# EAGLE board PoppingElement-array (EAGLE 6.5.0)
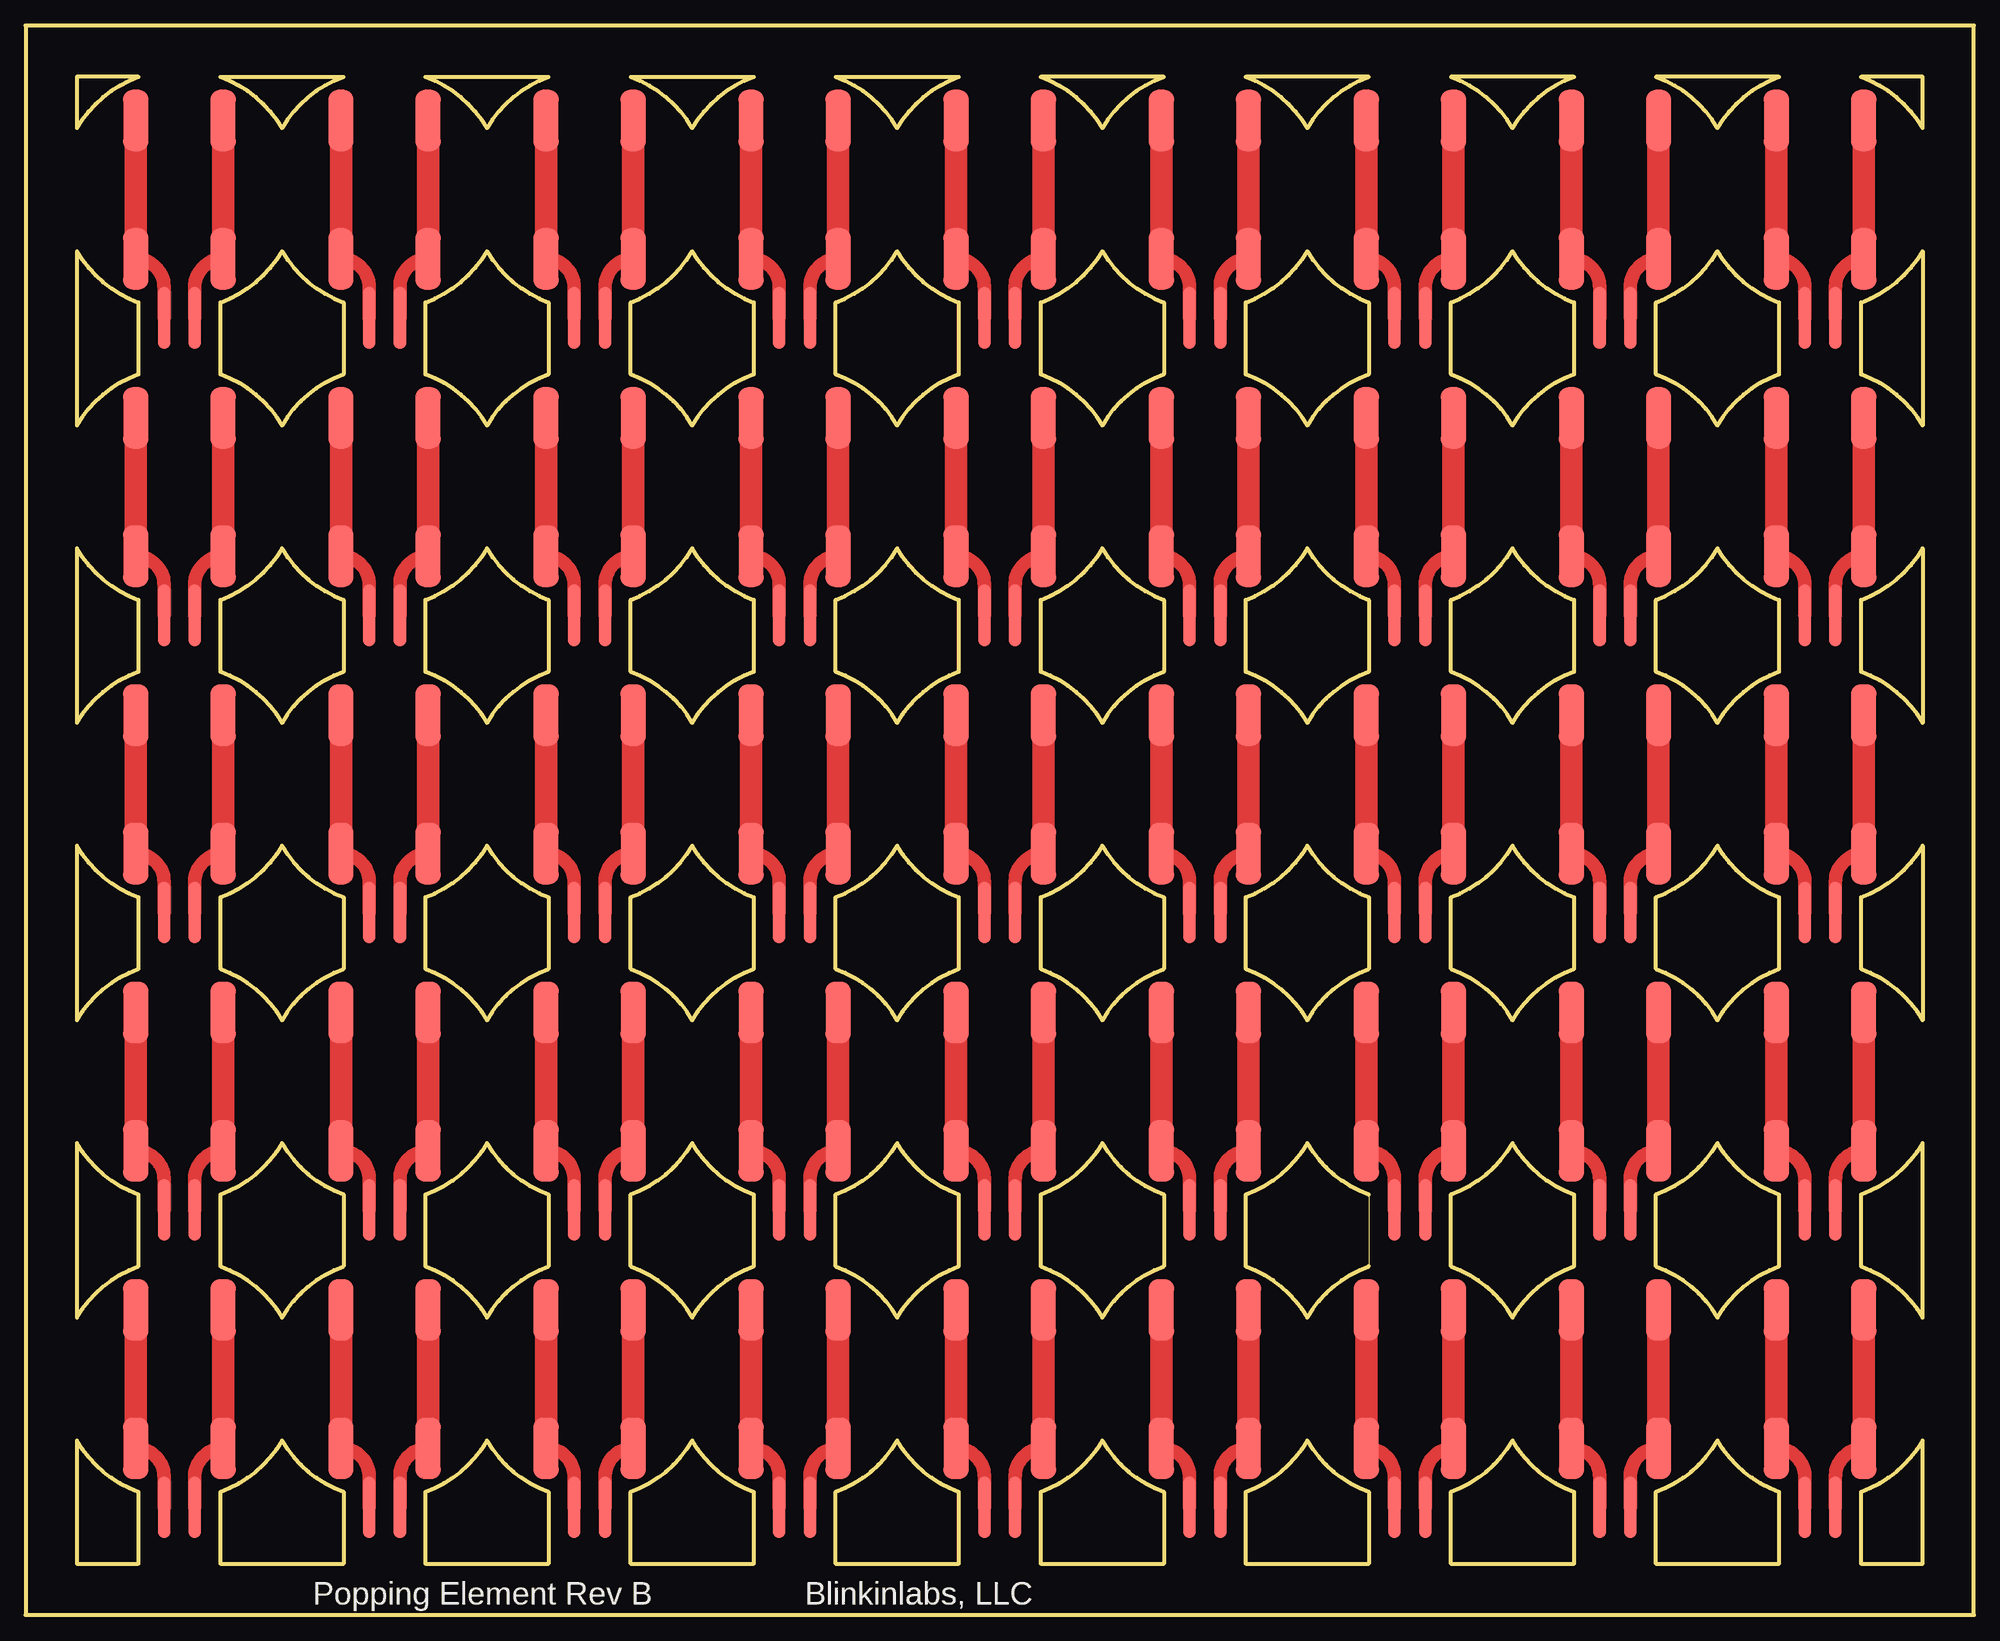
[diagram p0: board, top side]
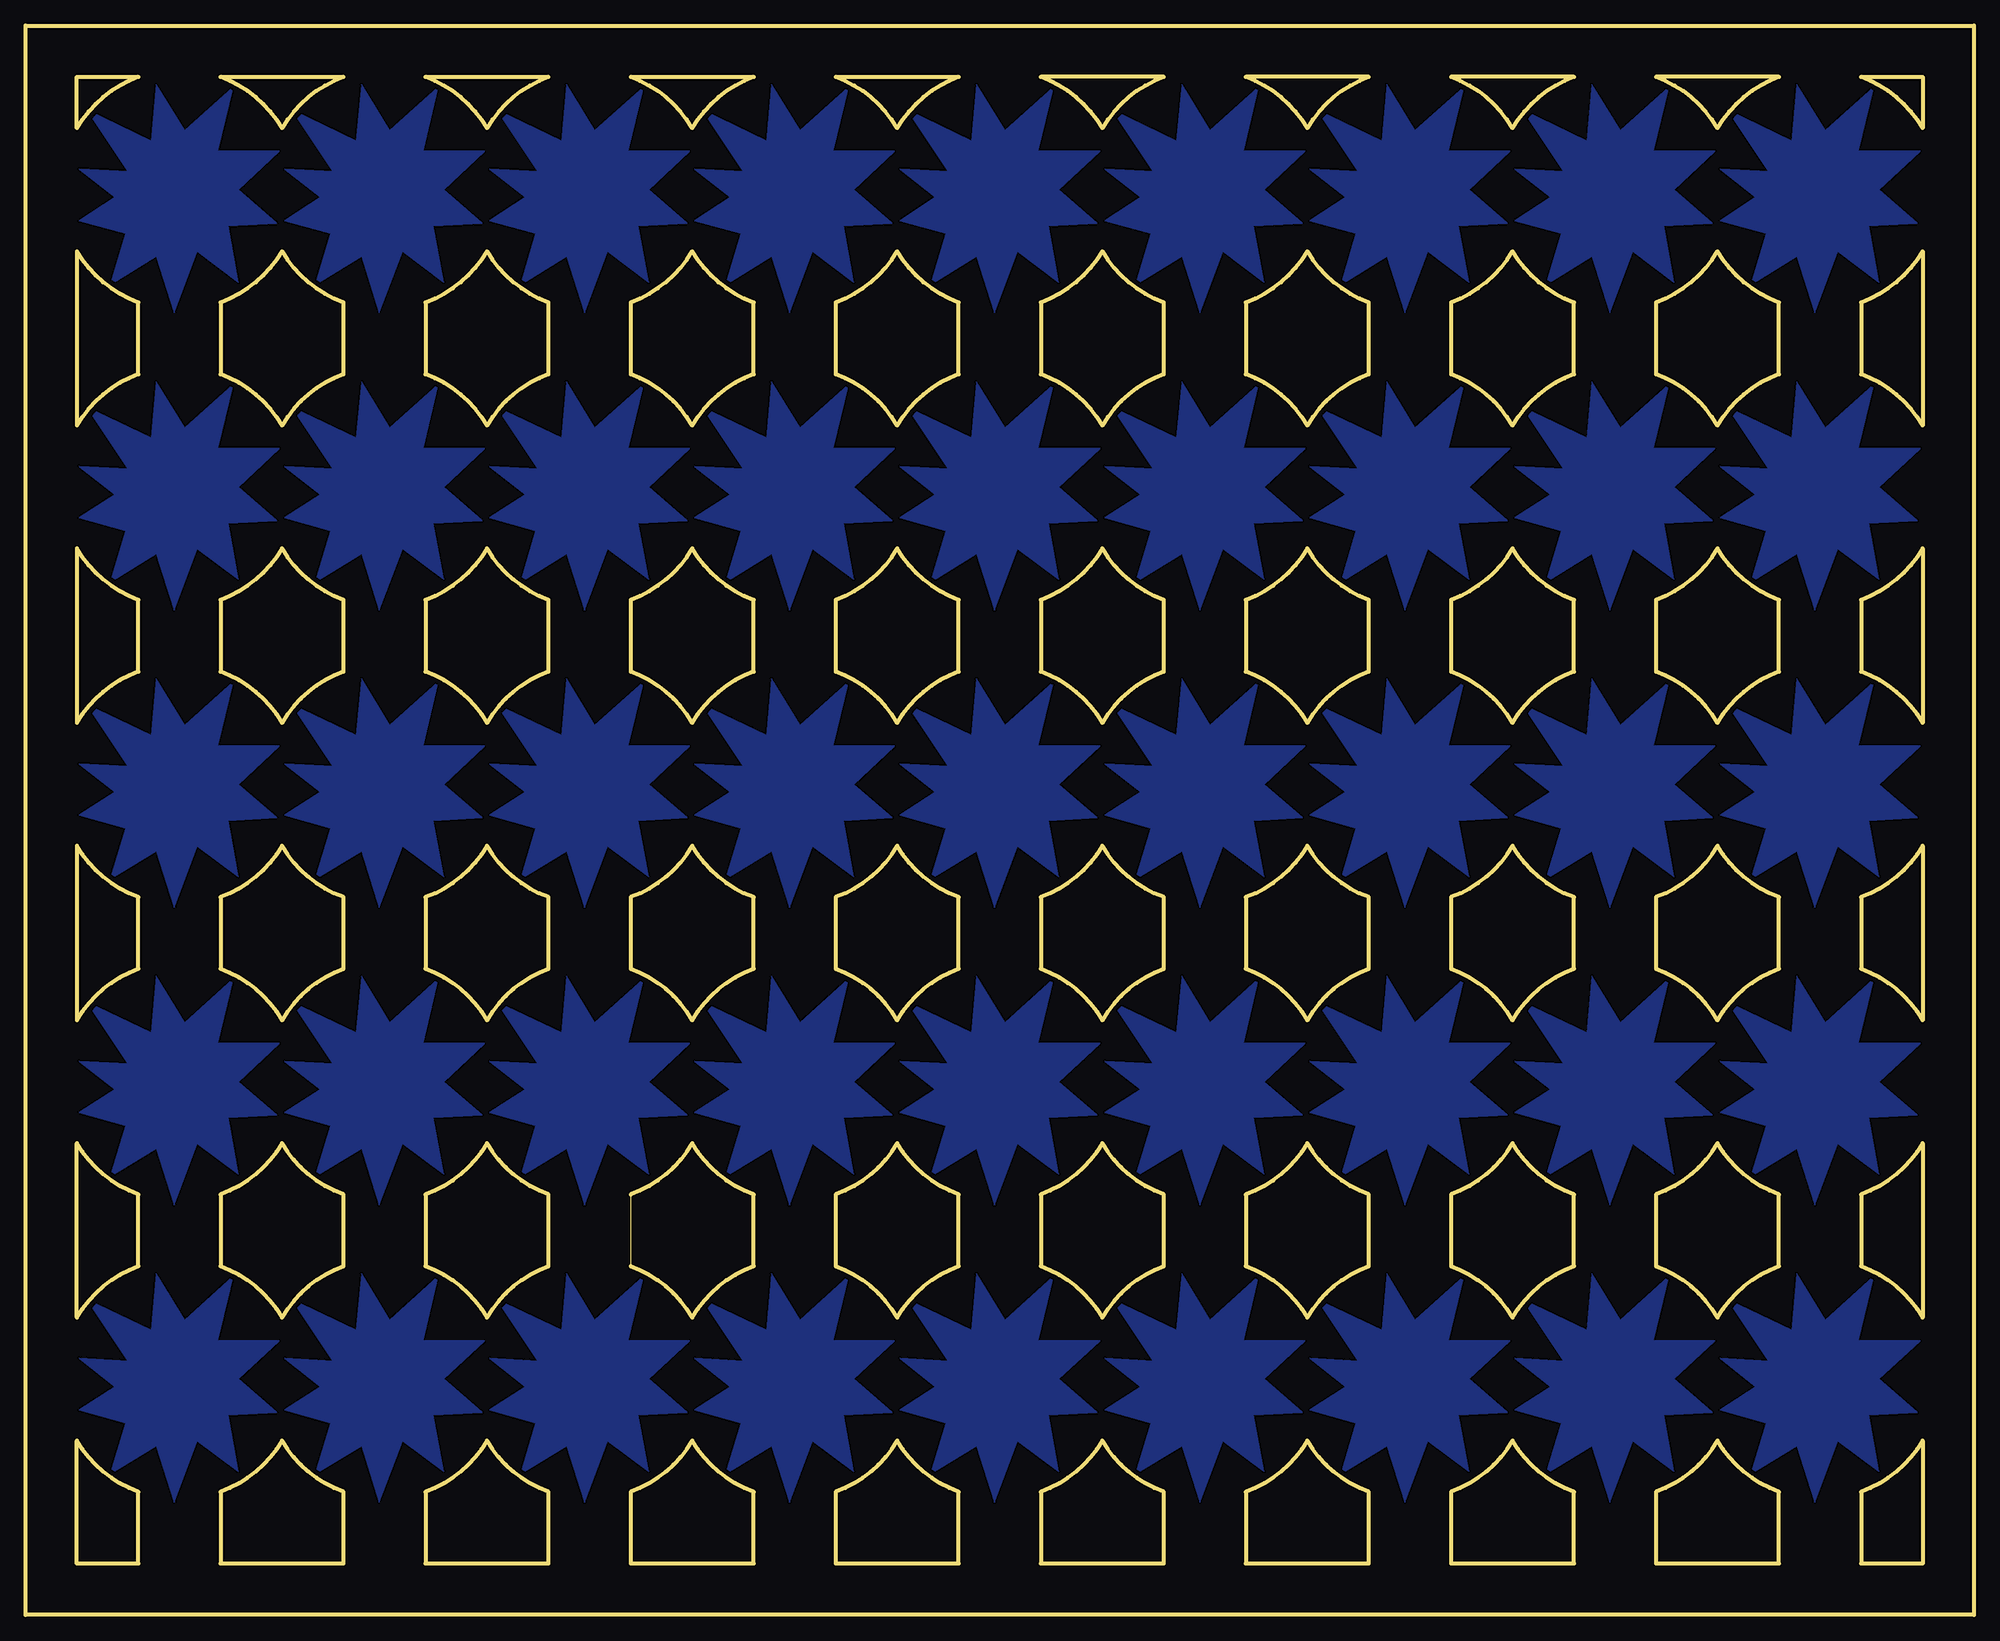
[diagram p1: board, bottom side, seen from below]

Size 190 x 155 mm. Coordinates in mm from the lower left corner, seen from the top.
Outline: 0,0 190,0 190,155 0,155 0,0
Outline: 19,121 19,128 arc40 25,133 arc40 31,128 31,121 arc40 25,116 arc40 19,121
Outline: 11,128 11,121 arc40 5,116 5,133 arc40 11,128
Outline: 19,150 arc-40 25,145 arc-40 31,150 19,150
Outline: 5,145 arc-40 11,150 5,150 5,145
Outline: 39,121 39,128 arc40 45,133 arc40 51,128 51,121 arc40 45,116 arc40 39,121
Outline: 39,150 arc-40 45,145 arc-40 51,150 39,150
Outline: 59,121 59,128 arc40 65,133 arc40 71,128 71,121 arc40 65,116 arc40 59,121
Outline: 59,150 arc-40 65,145 arc-40 71,150 59,150
Outline: 79,121 79,128 arc40 85,133 arc40 91,128 91,121 arc40 85,116 arc40 79,121
Outline: 79,150 arc-40 85,145 arc-40 91,150 79,150
Outline: 99,121 99,128 arc40 105,133 arc40 111,128 111,121 arc40 105,116 arc40 99,121
Outline: 99,150 arc-40 105,145 arc-40 111,150 99,150
Outline: 119,121 119,128 arc40 125,133 arc40 131,128 131,121 arc40 125,116 arc40 119,121
Outline: 119,150 arc-40 125,145 arc-40 131,150 119,150
Outline: 139,121 139,128 arc40 145,133 arc40 151,128 151,121 arc40 145,116 arc40 139,121
Outline: 139,150 arc-40 145,145 arc-40 151,150 139,150
Outline: 159,121 159,128 arc40 165,133 arc40 171,128 171,121 arc40 165,116 arc40 159,121
Outline: 159,150 arc-40 165,145 arc-40 171,150 159,150
Outline: 179,121 179,128 arc40 185,133 185,116 arc40 179,121
Outline: 179,150 arc-40 185,145 185,150 179,150
Outline: 19,92 19,99 arc40 25,104 arc40 31,99 31,92 arc40 25,87 arc40 19,92
Outline: 11,99 11,92 arc40 5,87 5,104 arc40 11,99
Outline: 39,92 39,99 arc40 45,104 arc40 51,99 51,92 arc40 45,87 arc40 39,92
Outline: 59,92 59,99 arc40 65,104 arc40 71,99 71,92 arc40 65,87 arc40 59,92
Outline: 79,92 79,99 arc40 85,104 arc40 91,99 91,92 arc40 85,87 arc40 79,92
Outline: 99,92 99,99 arc40 105,104 arc40 111,99 111,92 arc40 105,87 arc40 99,92
Outline: 119,92 119,99 arc40 125,104 arc40 131,99 131,92 arc40 125,87 arc40 119,92
Outline: 139,92 139,99 arc40 145,104 arc40 151,99 151,92 arc40 145,87 arc40 139,92
Outline: 159,92 159,99 arc40 165,104 arc40 171,99 171,92 arc40 165,87 arc40 159,92
Outline: 179,92 179,99 arc40 185,104 185,87 arc40 179,92
Outline: 19,63 19,70 arc40 25,75 arc40 31,70 31,63 arc40 25,58 arc40 19,63
Outline: 11,70 11,63 arc40 5,58 5,75 arc40 11,70
Outline: 39,63 39,70 arc40 45,75 arc40 51,70 51,63 arc40 45,58 arc40 39,63
Outline: 59,63 59,70 arc40 65,75 arc40 71,70 71,63 arc40 65,58 arc40 59,63
Outline: 79,63 79,70 arc40 85,75 arc40 91,70 91,63 arc40 85,58 arc40 79,63
Outline: 99,63 99,70 arc40 105,75 arc40 111,70 111,63 arc40 105,58 arc40 99,63
Outline: 119,63 119,70 arc40 125,75 arc40 131,70 131,63 arc40 125,58 arc40 119,63
Outline: 139,63 139,70 arc40 145,75 arc40 151,70 151,63 arc40 145,58 arc40 139,63
Outline: 159,63 159,70 arc40 165,75 arc40 171,70 171,63 arc40 165,58 arc40 159,63
Outline: 179,63 179,70 arc40 185,75 185,58 arc40 179,63
Outline: 19,34 19,41 arc40 25,46 arc40 31,41 31,34 arc40 25,29 arc40 19,34
Outline: 11,41 11,34 arc40 5,29 5,46 arc40 11,41
Outline: 39,34 39,41 arc40 45,46 arc40 51,41 51,34 arc40 45,29 arc40 39,34
Outline: 59,34 59,41 arc40 65,46 arc40 71,41 71,34 arc40 65,29 arc40 59,34
Outline: 79,34 79,41 arc40 85,46 arc40 91,41 91,34 arc40 85,29 arc40 79,34
Outline: 99,34 99,41 arc40 105,46 arc40 111,41 111,34 arc40 105,29 arc40 99,34
Outline: 119,34 119,41 arc40 125,46 arc40 131,41 131,34 arc40 125,29 arc40 119,34
Outline: 139,34 139,41 arc40 145,46 arc40 151,41 151,34 arc40 145,29 arc40 139,34
Outline: 159,34 159,41 arc40 165,46 arc40 171,41 171,34 arc40 165,29 arc40 159,34
Outline: 179,34 179,41 arc40 185,46 185,29 arc40 179,34
Outline: 19,5 19,12 arc40 25,17 arc40 31,12 31,5 19,5
Outline: 11,12 11,5 5,5 5,17 arc40 11,12
Outline: 39,5 39,12 arc40 45,17 arc40 51,12 51,5 39,5
Outline: 59,5 59,12 arc40 65,17 arc40 71,12 71,5 59,5
Outline: 79,5 79,12 arc40 85,17 arc40 91,12 91,5 79,5
Outline: 99,5 99,12 arc40 105,17 arc40 111,12 111,5 99,5
Outline: 119,5 119,12 arc40 125,17 arc40 131,12 131,5 119,5
Outline: 139,5 139,12 arc40 145,17 arc40 151,12 151,5 139,5
Outline: 159,5 159,12 arc40 165,17 arc40 171,12 171,5 159,5
Outline: 179,5 179,12 arc40 185,17 185,5 179,5
Copper layers (1*16): Top 0.035mm / dielectric 1.5mm / Bottom 0.035mm
Design rules "default *": minimum track width 10mil, minimum drill 24mil, track to track 8mil, track to pad 8mil, pad to pad 8mil, via to via 8mil, smd to smd 8mil, copper to edge 0.5mm, drill to drill 8mil, minimum pad ring 10mil, minimum via ring 8mil, stop-mask expansion 4mil, vias tented up to drill 0mil, thermal gap 10mil

## Footprints (pad centres in the part's own frame; a part is rotated, then mirrored left to right if it is on the bottom)
CIGARETTE_LIGHTER = smd 2.5 x 6: P$1 -4.25,6.75; P$2 4.25,6.75; P$3 -4.25,-6.75; P$4 4.25,-6.75
PADS_2MMX2 = smd 1.2 x 6: P$1 1.5,0; P$2 -1.5,0

## Placement (x,y rotation side)
U$1  CIGARETTE_LIGHTER  [CIGARETTE_LIGHTER]  15,110 0 top
U$2  M02  [PADS_2MMX2]  15,97.5 0 top
U$5  CIGARETTE_LIGHTER  [CIGARETTE_LIGHTER]  35,110 0 top
U$6  M02  [PADS_2MMX2]  35,97.5 0 top
U$7  CIGARETTE_LIGHTER  [CIGARETTE_LIGHTER]  55,110 0 top
U$8  M02  [PADS_2MMX2]  55,97.5 0 top
U$9  CIGARETTE_LIGHTER  [CIGARETTE_LIGHTER]  15,139 0 top
U$10  M02  [PADS_2MMX2]  15,126.5 0 top
U$11  CIGARETTE_LIGHTER  [CIGARETTE_LIGHTER]  35,139 0 top
U$12  M02  [PADS_2MMX2]  35,126.5 0 top
U$13  CIGARETTE_LIGHTER  [CIGARETTE_LIGHTER]  55,139 0 top
U$14  M02  [PADS_2MMX2]  55,126.5 0 top
U$15  CIGARETTE_LIGHTER  [CIGARETTE_LIGHTER]  75,139 0 top
U$16  M02  [PADS_2MMX2]  75,126.5 0 top
U$17  CIGARETTE_LIGHTER  [CIGARETTE_LIGHTER]  15,23 0 top
U$18  M02  [PADS_2MMX2]  15,10.5 0 top
U$19  CIGARETTE_LIGHTER  [CIGARETTE_LIGHTER]  35,23 0 top
U$20  M02  [PADS_2MMX2]  35,10.5 0 top
U$21  CIGARETTE_LIGHTER  [CIGARETTE_LIGHTER]  95,139 0 top
U$22  M02  [PADS_2MMX2]  95,126.5 0 top
U$23  CIGARETTE_LIGHTER  [CIGARETTE_LIGHTER]  115,139 0 top
U$24  M02  [PADS_2MMX2]  115,126.5 0 top
U$25  CIGARETTE_LIGHTER  [CIGARETTE_LIGHTER]  135,139 0 top
U$26  M02  [PADS_2MMX2]  135,126.5 0 top
U$27  CIGARETTE_LIGHTER  [CIGARETTE_LIGHTER]  155,139 0 top
U$28  M02  [PADS_2MMX2]  155,126.5 0 top
U$29  CIGARETTE_LIGHTER  [CIGARETTE_LIGHTER]  175,139 0 top
U$30  M02  [PADS_2MMX2]  175,126.5 0 top
U$31  CIGARETTE_LIGHTER  [CIGARETTE_LIGHTER]  75,110 0 top
U$32  M02  [PADS_2MMX2]  75,97.5 0 top
U$33  CIGARETTE_LIGHTER  [CIGARETTE_LIGHTER]  95,110 0 top
U$34  M02  [PADS_2MMX2]  95,97.5 0 top
U$35  CIGARETTE_LIGHTER  [CIGARETTE_LIGHTER]  115,110 0 top
U$36  M02  [PADS_2MMX2]  115,97.5 0 top
U$37  CIGARETTE_LIGHTER  [CIGARETTE_LIGHTER]  135,110 0 top
U$38  M02  [PADS_2MMX2]  135,97.5 0 top
U$39  CIGARETTE_LIGHTER  [CIGARETTE_LIGHTER]  155,110 0 top
U$40  M02  [PADS_2MMX2]  155,97.5 0 top
U$41  CIGARETTE_LIGHTER  [CIGARETTE_LIGHTER]  175,110 0 top
U$42  M02  [PADS_2MMX2]  175,97.5 0 top
U$43  CIGARETTE_LIGHTER  [CIGARETTE_LIGHTER]  15,81 0 top
U$44  M02  [PADS_2MMX2]  15,68.5 0 top
U$45  CIGARETTE_LIGHTER  [CIGARETTE_LIGHTER]  35,81 0 top
U$46  M02  [PADS_2MMX2]  35,68.5 0 top
U$47  CIGARETTE_LIGHTER  [CIGARETTE_LIGHTER]  55,81 0 top
U$48  M02  [PADS_2MMX2]  55,68.5 0 top
U$49  CIGARETTE_LIGHTER  [CIGARETTE_LIGHTER]  75,81 0 top
U$50  M02  [PADS_2MMX2]  75,68.5 0 top
U$51  CIGARETTE_LIGHTER  [CIGARETTE_LIGHTER]  95,81 0 top
U$52  M02  [PADS_2MMX2]  95,68.5 0 top
U$53  CIGARETTE_LIGHTER  [CIGARETTE_LIGHTER]  115,81 0 top
U$54  M02  [PADS_2MMX2]  115,68.5 0 top
U$55  CIGARETTE_LIGHTER  [CIGARETTE_LIGHTER]  135,81 0 top
U$56  M02  [PADS_2MMX2]  135,68.5 0 top
U$57  CIGARETTE_LIGHTER  [CIGARETTE_LIGHTER]  155,81 0 top
U$58  M02  [PADS_2MMX2]  155,68.5 0 top
U$59  CIGARETTE_LIGHTER  [CIGARETTE_LIGHTER]  175,81 0 top
U$60  M02  [PADS_2MMX2]  175,68.5 0 top
U$61  CIGARETTE_LIGHTER  [CIGARETTE_LIGHTER]  15,52 0 top
U$62  M02  [PADS_2MMX2]  15,39.5 0 top
U$63  CIGARETTE_LIGHTER  [CIGARETTE_LIGHTER]  35,52 0 top
U$64  M02  [PADS_2MMX2]  35,39.5 0 top
U$65  CIGARETTE_LIGHTER  [CIGARETTE_LIGHTER]  55,52 0 top
U$66  M02  [PADS_2MMX2]  55,39.5 0 top
U$67  CIGARETTE_LIGHTER  [CIGARETTE_LIGHTER]  75,52 0 top
U$68  M02  [PADS_2MMX2]  75,39.5 0 top
U$69  CIGARETTE_LIGHTER  [CIGARETTE_LIGHTER]  95,52 0 top
U$70  M02  [PADS_2MMX2]  95,39.5 0 top
U$71  CIGARETTE_LIGHTER  [CIGARETTE_LIGHTER]  115,52 0 top
U$72  M02  [PADS_2MMX2]  115,39.5 0 top
U$73  CIGARETTE_LIGHTER  [CIGARETTE_LIGHTER]  135,52 0 top
U$74  M02  [PADS_2MMX2]  135,39.5 0 top
U$75  CIGARETTE_LIGHTER  [CIGARETTE_LIGHTER]  155,52 0 top
U$76  M02  [PADS_2MMX2]  155,39.5 0 top
U$77  CIGARETTE_LIGHTER  [CIGARETTE_LIGHTER]  175,52 0 top
U$78  M02  [PADS_2MMX2]  175,39.5 0 top
U$79  CIGARETTE_LIGHTER  [CIGARETTE_LIGHTER]  55,23 0 top
U$80  M02  [PADS_2MMX2]  55,10.5 0 top
U$81  CIGARETTE_LIGHTER  [CIGARETTE_LIGHTER]  75,23 0 top
U$82  M02  [PADS_2MMX2]  75,10.5 0 top
U$83  CIGARETTE_LIGHTER  [CIGARETTE_LIGHTER]  95,23 0 top
U$84  M02  [PADS_2MMX2]  95,10.5 0 top
U$85  CIGARETTE_LIGHTER  [CIGARETTE_LIGHTER]  115,23 0 top
U$86  M02  [PADS_2MMX2]  115,10.5 0 top
U$87  CIGARETTE_LIGHTER  [CIGARETTE_LIGHTER]  135,23 0 top
U$88  M02  [PADS_2MMX2]  135,10.5 0 top
U$89  CIGARETTE_LIGHTER  [CIGARETTE_LIGHTER]  155,23 0 top
U$90  M02  [PADS_2MMX2]  155,10.5 0 top
U$91  CIGARETTE_LIGHTER  [CIGARETTE_LIGHTER]  175,23 0 top
U$92  M02  [PADS_2MMX2]  175,10.5 0 top

## Library data of the parts
U$1 U$2 U$5-U$92 = blinkinlabs

## Nets
N$1: U$1.P$1 U$1.P$3 U$2.P$2
N$2: U$1.P$2 U$1.P$4 U$2.P$1
N$7: U$5.P$1 U$5.P$3 U$6.P$2
N$8: U$5.P$2 U$5.P$4 U$6.P$1
N$10: U$7.P$1 U$7.P$3 U$8.P$2
N$11: U$7.P$2 U$7.P$4 U$8.P$1
N$13: U$9.P$1 U$9.P$3 U$10.P$2
N$14: U$9.P$2 U$9.P$4 U$10.P$1
N$16: U$11.P$1 U$11.P$3 U$12.P$2
N$17: U$11.P$2 U$11.P$4 U$12.P$1
N$19: U$13.P$1 U$13.P$3 U$14.P$2
N$20: U$13.P$2 U$13.P$4 U$14.P$1
N$22: U$15.P$1 U$15.P$3 U$16.P$2
N$23: U$15.P$2 U$15.P$4 U$16.P$1
N$25: U$21.P$1 U$21.P$3 U$22.P$2
N$26: U$17.P$1 U$17.P$3 U$18.P$2
N$27: U$17.P$2 U$17.P$4 U$18.P$1
N$29: U$19.P$1 U$19.P$3 U$20.P$2
N$30: U$19.P$2 U$19.P$4 U$20.P$1
N$32: U$21.P$2 U$21.P$4 U$22.P$1
N$33: U$31.P$1 U$31.P$3 U$32.P$2
N$35: U$23.P$1 U$23.P$3 U$24.P$2
N$36: U$23.P$2 U$23.P$4 U$24.P$1
N$38: U$25.P$1 U$25.P$3 U$26.P$2
N$39: U$25.P$2 U$25.P$4 U$26.P$1
N$41: U$27.P$1 U$27.P$3 U$28.P$2
N$42: U$27.P$2 U$27.P$4 U$28.P$1
N$44: U$29.P$1 U$29.P$3 U$30.P$2
N$45: U$29.P$2 U$29.P$4 U$30.P$1
N$47: U$31.P$2 U$31.P$4 U$32.P$1
N$49: U$33.P$1 U$33.P$3 U$34.P$2
N$50: U$33.P$2 U$33.P$4 U$34.P$1
N$52: U$35.P$1 U$35.P$3 U$36.P$2
N$53: U$35.P$2 U$35.P$4 U$36.P$1
N$55: U$37.P$1 U$37.P$3 U$38.P$2
N$56: U$37.P$2 U$37.P$4 U$38.P$1
N$58: U$39.P$1 U$39.P$3 U$40.P$2
N$59: U$39.P$2 U$39.P$4 U$40.P$1
N$61: U$41.P$1 U$41.P$3 U$42.P$2
N$62: U$41.P$2 U$41.P$4 U$42.P$1
N$64: U$43.P$1 U$43.P$3 U$44.P$2
N$65: U$43.P$2 U$43.P$4 U$44.P$1
N$67: U$45.P$1 U$45.P$3 U$46.P$2
N$68: U$45.P$2 U$45.P$4 U$46.P$1
N$70: U$47.P$1 U$47.P$3 U$48.P$2
N$71: U$47.P$2 U$47.P$4 U$48.P$1
N$73: U$49.P$1 U$49.P$3 U$50.P$2
N$74: U$49.P$2 U$49.P$4 U$50.P$1
N$76: U$51.P$1 U$51.P$3 U$52.P$2
N$77: U$51.P$2 U$51.P$4 U$52.P$1
N$79: U$53.P$1 U$53.P$3 U$54.P$2
N$80: U$53.P$2 U$53.P$4 U$54.P$1
N$82: U$55.P$1 U$55.P$3 U$56.P$2
N$83: U$55.P$2 U$55.P$4 U$56.P$1
N$85: U$57.P$1 U$57.P$3 U$58.P$2
N$86: U$57.P$2 U$57.P$4 U$58.P$1
N$88: U$59.P$1 U$59.P$3 U$60.P$2
N$89: U$59.P$2 U$59.P$4 U$60.P$1
N$91: U$61.P$1 U$61.P$3 U$62.P$2
N$92: U$61.P$2 U$61.P$4 U$62.P$1
N$94: U$63.P$1 U$63.P$3 U$64.P$2
N$95: U$63.P$2 U$63.P$4 U$64.P$1
N$97: U$65.P$1 U$65.P$3 U$66.P$2
N$98: U$65.P$2 U$65.P$4 U$66.P$1
N$100: U$67.P$1 U$67.P$3 U$68.P$2
N$101: U$67.P$2 U$67.P$4 U$68.P$1
N$103: U$69.P$1 U$69.P$3 U$70.P$2
N$104: U$69.P$2 U$69.P$4 U$70.P$1
N$106: U$71.P$1 U$71.P$3 U$72.P$2
N$107: U$71.P$2 U$71.P$4 U$72.P$1
N$109: U$73.P$1 U$73.P$3 U$74.P$2
N$110: U$73.P$2 U$73.P$4 U$74.P$1
N$112: U$75.P$1 U$75.P$3 U$76.P$2
N$113: U$75.P$2 U$75.P$4 U$76.P$1
N$115: U$77.P$1 U$77.P$3 U$78.P$2
N$116: U$77.P$2 U$77.P$4 U$78.P$1
N$118: U$79.P$1 U$79.P$3 U$80.P$2
N$119: U$79.P$2 U$79.P$4 U$80.P$1
N$121: U$81.P$1 U$81.P$3 U$82.P$2
N$122: U$81.P$2 U$81.P$4 U$82.P$1
N$124: U$83.P$1 U$83.P$3 U$84.P$2
N$125: U$83.P$2 U$83.P$4 U$84.P$1
N$127: U$85.P$1 U$85.P$3 U$86.P$2
N$128: U$85.P$2 U$85.P$4 U$86.P$1
N$130: U$87.P$1 U$87.P$3 U$88.P$2
N$131: U$87.P$2 U$87.P$4 U$88.P$1
N$133: U$89.P$1 U$89.P$3 U$90.P$2
N$134: U$89.P$2 U$89.P$4 U$90.P$1
N$136: U$91.P$1 U$91.P$3 U$92.P$2
N$137: U$91.P$2 U$91.P$4 U$92.P$1

## Tracks (layer width: path | path; a pad name or v marks a point on that pad's centre or on a via)
N$1
  Top 1.3: U$2.P$2 13.5,100.5 arc90 U$1.P$3
  Top 2.184: U$1.P$1 U$1.P$3
N$2
  Top 1.3: U$1.P$4 arc90 16.5,100.5 U$2.P$1
  Top 2.184: U$1.P$2 U$1.P$4
N$4
  pour Bottom: 17.25,103.5 15.5,98 13.25,104 9.25,101 10.25,106.5 5.5,106.75 9.25,110 5.25,113.75 11.25,113.75 9.75,120 14.5,115.75 17.25,120.25 17.75,114.75 24,117.75 20,111.75 24.75,112 21.25,109.25 24.75,107 20.25,105.75 21.75,100.75
N$7
  Top 1.3: U$6.P$2 33.5,100.5 arc90 U$5.P$3
  Top 2.184: U$5.P$1 U$5.P$3
N$8
  Top 1.3: U$5.P$4 arc90 36.5,100.5 U$6.P$1
  Top 2.184: U$5.P$2 U$5.P$4
N$9
  pour Bottom: 37.25,103.5 35.5,98 33.25,104 29.25,101 30.25,106.5 25.5,106.75 29.25,110 25.25,113.75 31.25,113.75 29.75,120 34.5,115.75 37.25,120.25 37.75,114.75 44,117.75 40,111.75 44.75,112 41.25,109.25 44.75,107 40.25,105.75 41.75,100.75
N$10
  Top 1.3: U$8.P$2 53.5,100.5 arc90 U$7.P$3
  Top 2.184: U$7.P$1 U$7.P$3
N$11
  Top 1.3: U$7.P$4 arc90 56.5,100.5 U$8.P$1
  Top 2.184: U$7.P$2 U$7.P$4
N$12
  pour Bottom: 57.25,103.5 55.5,98 53.25,104 49.25,101 50.25,106.5 45.5,106.75 49.25,110 45.25,113.75 51.25,113.75 49.75,120 54.5,115.75 57.25,120.25 57.75,114.75 64,117.75 60,111.75 64.75,112 61.25,109.25 64.75,107 60.25,105.75 61.75,100.75
N$13
  Top 1.3: U$10.P$2 13.5,129.5 arc90 U$9.P$3
  Top 2.184: U$9.P$1 U$9.P$3
N$14
  Top 1.3: U$9.P$4 arc90 16.5,129.5 U$10.P$1
  Top 2.184: U$9.P$2 U$9.P$4
N$15
  pour Bottom: 17.25,132.5 15.5,127 13.25,133 9.25,130 10.25,135.5 5.5,135.75 9.25,139 5.25,142.75 11.25,142.75 9.75,149 14.5,144.75 17.25,149.25 17.75,143.75 24,146.75 20,140.75 24.75,141 21.25,138.25 24.75,136 20.25,134.75 21.75,129.75
N$16
  Top 1.3: U$12.P$2 33.5,129.5 arc90 U$11.P$3
  Top 2.184: U$11.P$1 U$11.P$3
N$17
  Top 1.3: U$11.P$4 arc90 36.5,129.5 U$12.P$1
  Top 2.184: U$11.P$2 U$11.P$4
N$18
  pour Bottom: 37.25,132.5 35.5,127 33.25,133 29.25,130 30.25,135.5 25.5,135.75 29.25,139 25.25,142.75 31.25,142.75 29.75,149 34.5,144.75 37.25,149.25 37.75,143.75 44,146.75 40,140.75 44.75,141 41.25,138.25 44.75,136 40.25,134.75 41.75,129.75
N$19
  Top 1.3: U$14.P$2 53.5,129.5 arc90 U$13.P$3
  Top 2.184: U$13.P$1 U$13.P$3
N$20
  Top 1.3: U$13.P$4 arc90 56.5,129.5 U$14.P$1
  Top 2.184: U$13.P$2 U$13.P$4
N$21
  pour Bottom: 57.25,132.5 55.5,127 53.25,133 49.25,130 50.25,135.5 45.5,135.75 49.25,139 45.25,142.75 51.25,142.75 49.75,149 54.5,144.75 57.25,149.25 57.75,143.75 64,146.75 60,140.75 64.75,141 61.25,138.25 64.75,136 60.25,134.75 61.75,129.75
N$22
  Top 1.3: U$16.P$2 73.5,129.5 arc90 U$15.P$3
  Top 2.184: U$15.P$1 U$15.P$3
N$23
  Top 1.3: U$15.P$4 arc90 76.5,129.5 U$16.P$1
  Top 2.184: U$15.P$2 U$15.P$4
N$24
  pour Bottom: 77.25,132.5 75.5,127 73.25,133 69.25,130 70.25,135.5 65.5,135.75 69.25,139 65.25,142.75 71.25,142.75 69.75,149 74.5,144.75 77.25,149.25 77.75,143.75 84,146.75 80,140.75 84.75,141 81.25,138.25 84.75,136 80.25,134.75 81.75,129.75
N$25
  Top 1.3: U$22.P$2 93.5,129.5 arc90 U$21.P$3
  Top 2.184: U$21.P$1 U$21.P$3
N$26
  Top 1.3: U$18.P$2 13.5,13.5 arc90 U$17.P$3
  Top 2.184: U$17.P$1 U$17.P$3
N$27
  Top 1.3: U$17.P$4 arc90 16.5,13.5 U$18.P$1
  Top 2.184: U$17.P$2 U$17.P$4
N$28
  pour Bottom: 17.25,16.5 15.5,11 13.25,17 9.25,14 10.25,19.5 5.5,19.75 9.25,23 5.25,26.75 11.25,26.75 9.75,33 14.5,28.75 17.25,33.25 17.75,27.75 24,30.75 20,24.75 24.75,25 21.25,22.25 24.75,20 20.25,18.75 21.75,13.75
N$29
  Top 1.3: U$20.P$2 33.5,13.5 arc90 U$19.P$3
  Top 2.184: U$19.P$1 U$19.P$3
N$30
  Top 1.3: U$19.P$4 arc90 36.5,13.5 U$20.P$1
  Top 2.184: U$19.P$2 U$19.P$4
N$31
  pour Bottom: 37.25,16.5 35.5,11 33.25,17 29.25,14 30.25,19.5 25.5,19.75 29.25,23 25.25,26.75 31.25,26.75 29.75,33 34.5,28.75 37.25,33.25 37.75,27.75 44,30.75 40,24.75 44.75,25 41.25,22.25 44.75,20 40.25,18.75 41.75,13.75
N$32
  Top 1.3: U$21.P$4 arc90 96.5,129.5 U$22.P$1
  Top 2.184: U$21.P$2 U$21.P$4
N$33
  Top 1.3: U$32.P$2 73.5,100.5 arc90 U$31.P$3
  Top 2.184: U$31.P$1 U$31.P$3
N$34
  pour Bottom: 97.25,132.5 95.5,127 93.25,133 89.25,130 90.25,135.5 85.5,135.75 89.25,139 85.25,142.75 91.25,142.75 89.75,149 94.5,144.75 97.25,149.25 97.75,143.75 104,146.75 100,140.75 104.75,141 101.25,138.25 104.75,136 100.25,134.75 101.75,129.75
N$35
  Top 1.3: U$24.P$2 113.5,129.5 arc90 U$23.P$3
  Top 2.184: U$23.P$1 U$23.P$3
N$36
  Top 1.3: U$23.P$4 arc90 116.5,129.5 U$24.P$1
  Top 2.184: U$23.P$2 U$23.P$4
N$37
  pour Bottom: 117.25,132.5 115.5,127 113.25,133 109.25,130 110.25,135.5 105.5,135.75 109.25,139 105.25,142.75 111.25,142.75 109.75,149 114.5,144.75 117.25,149.25 117.75,143.75 124,146.75 120,140.75 124.75,141 121.25,138.25 124.75,136 120.25,134.75 121.75,129.75
N$38
  Top 1.3: U$26.P$2 133.5,129.5 arc90 U$25.P$3
  Top 2.184: U$25.P$1 U$25.P$3
N$39
  Top 1.3: U$25.P$4 arc90 136.5,129.5 U$26.P$1
  Top 2.184: U$25.P$2 U$25.P$4
N$40
  pour Bottom: 137.25,132.5 135.5,127 133.25,133 129.25,130 130.25,135.5 125.5,135.75 129.25,139 125.25,142.75 131.25,142.75 129.75,149 134.5,144.75 137.25,149.25 137.75,143.75 144,146.75 140,140.75 144.75,141 141.25,138.25 144.75,136 140.25,134.75 141.75,129.75
N$41
  Top 1.3: U$28.P$2 153.5,129.5 arc90 U$27.P$3
  Top 2.184: U$27.P$1 U$27.P$3
N$42
  Top 1.3: U$27.P$4 arc90 156.5,129.5 U$28.P$1
  Top 2.184: U$27.P$2 U$27.P$4
N$43
  pour Bottom: 157.25,132.5 155.5,127 153.25,133 149.25,130 150.25,135.5 145.5,135.75 149.25,139 145.25,142.75 151.25,142.75 149.75,149 154.5,144.75 157.25,149.25 157.75,143.75 164,146.75 160,140.75 164.75,141 161.25,138.25 164.75,136 160.25,134.75 161.75,129.75
N$44
  Top 1.3: U$30.P$2 173.5,129.5 arc90 U$29.P$3
  Top 2.184: U$29.P$1 U$29.P$3
N$45
  Top 1.3: U$29.P$4 arc90 176.5,129.5 U$30.P$1
  Top 2.184: U$29.P$2 U$29.P$4
N$46
  pour Bottom: 177.25,132.5 175.5,127 173.25,133 169.25,130 170.25,135.5 165.5,135.75 169.25,139 165.25,142.75 171.25,142.75 169.75,149 174.5,144.75 177.25,149.25 177.75,143.75 184,146.75 180,140.75 184.75,141 181.25,138.25 184.75,136 180.25,134.75 181.75,129.75
N$47
  Top 1.3: U$31.P$4 arc90 76.5,100.5 U$32.P$1
  Top 2.184: U$31.P$2 U$31.P$4
N$48
  pour Bottom: 77.25,103.5 75.5,98 73.25,104 69.25,101 70.25,106.5 65.5,106.75 69.25,110 65.25,113.75 71.25,113.75 69.75,120 74.5,115.75 77.25,120.25 77.75,114.75 84,117.75 80,111.75 84.75,112 81.25,109.25 84.75,107 80.25,105.75 81.75,100.75
N$49
  Top 1.3: U$34.P$2 93.5,100.5 arc90 U$33.P$3
  Top 2.184: U$33.P$1 U$33.P$3
N$50
  Top 1.3: U$33.P$4 arc90 96.5,100.5 U$34.P$1
  Top 2.184: U$33.P$2 U$33.P$4
N$51
  pour Bottom: 97.25,103.5 95.5,98 93.25,104 89.25,101 90.25,106.5 85.5,106.75 89.25,110 85.25,113.75 91.25,113.75 89.75,120 94.5,115.75 97.25,120.25 97.75,114.75 104,117.75 100,111.75 104.75,112 101.25,109.25 104.75,107 100.25,105.75 101.75,100.75
N$52
  Top 1.3: U$36.P$2 113.5,100.5 arc90 U$35.P$3
  Top 2.184: U$35.P$1 U$35.P$3
N$53
  Top 1.3: U$35.P$4 arc90 116.5,100.5 U$36.P$1
  Top 2.184: U$35.P$2 U$35.P$4
N$54
  pour Bottom: 117.25,103.5 115.5,98 113.25,104 109.25,101 110.25,106.5 105.5,106.75 109.25,110 105.25,113.75 111.25,113.75 109.75,120 114.5,115.75 117.25,120.25 117.75,114.75 124,117.75 120,111.75 124.75,112 121.25,109.25 124.75,107 120.25,105.75 121.75,100.75
N$55
  Top 1.3: U$38.P$2 133.5,100.5 arc90 U$37.P$3
  Top 2.184: U$37.P$1 U$37.P$3
N$56
  Top 1.3: U$37.P$4 arc90 136.5,100.5 U$38.P$1
  Top 2.184: U$37.P$2 U$37.P$4
N$57
  pour Bottom: 137.25,103.5 135.5,98 133.25,104 129.25,101 130.25,106.5 125.5,106.75 129.25,110 125.25,113.75 131.25,113.75 129.75,120 134.5,115.75 137.25,120.25 137.75,114.75 144,117.75 140,111.75 144.75,112 141.25,109.25 144.75,107 140.25,105.75 141.75,100.75
N$58
  Top 1.3: U$40.P$2 153.5,100.5 arc90 U$39.P$3
  Top 2.184: U$39.P$1 U$39.P$3
N$59
  Top 1.3: U$39.P$4 arc90 156.5,100.5 U$40.P$1
  Top 2.184: U$39.P$2 U$39.P$4
N$60
  pour Bottom: 157.25,103.5 155.5,98 153.25,104 149.25,101 150.25,106.5 145.5,106.75 149.25,110 145.25,113.75 151.25,113.75 149.75,120 154.5,115.75 157.25,120.25 157.75,114.75 164,117.75 160,111.75 164.75,112 161.25,109.25 164.75,107 160.25,105.75 161.75,100.75
N$61
  Top 1.3: U$42.P$2 173.5,100.5 arc90 U$41.P$3
  Top 2.184: U$41.P$1 U$41.P$3
N$62
  Top 1.3: U$41.P$4 arc90 176.5,100.5 U$42.P$1
  Top 2.184: U$41.P$2 U$41.P$4
N$63
  pour Bottom: 177.25,103.5 175.5,98 173.25,104 169.25,101 170.25,106.5 165.5,106.75 169.25,110 165.25,113.75 171.25,113.75 169.75,120 174.5,115.75 177.25,120.25 177.75,114.75 184,117.75 180,111.75 184.75,112 181.25,109.25 184.75,107 180.25,105.75 181.75,100.75
N$64
  Top 1.3: U$44.P$2 13.5,71.5 arc90 U$43.P$3
  Top 2.184: U$43.P$1 U$43.P$3
N$65
  Top 1.3: U$43.P$4 arc90 16.5,71.5 U$44.P$1
  Top 2.184: U$43.P$2 U$43.P$4
N$66
  pour Bottom: 17.25,74.5 15.5,69 13.25,75 9.25,72 10.25,77.5 5.5,77.75 9.25,81 5.25,84.75 11.25,84.75 9.75,91 14.5,86.75 17.25,91.25 17.75,85.75 24,88.75 20,82.75 24.75,83 21.25,80.25 24.75,78 20.25,76.75 21.75,71.75
N$67
  Top 1.3: U$46.P$2 33.5,71.5 arc90 U$45.P$3
  Top 2.184: U$45.P$1 U$45.P$3
N$68
  Top 1.3: U$45.P$4 arc90 36.5,71.5 U$46.P$1
  Top 2.184: U$45.P$2 U$45.P$4
N$69
  pour Bottom: 37.25,74.5 35.5,69 33.25,75 29.25,72 30.25,77.5 25.5,77.75 29.25,81 25.25,84.75 31.25,84.75 29.75,91 34.5,86.75 37.25,91.25 37.75,85.75 44,88.75 40,82.75 44.75,83 41.25,80.25 44.75,78 40.25,76.75 41.75,71.75
N$70
  Top 1.3: U$48.P$2 53.5,71.5 arc90 U$47.P$3
  Top 2.184: U$47.P$1 U$47.P$3
N$71
  Top 1.3: U$47.P$4 arc90 56.5,71.5 U$48.P$1
  Top 2.184: U$47.P$2 U$47.P$4
N$72
  pour Bottom: 57.25,74.5 55.5,69 53.25,75 49.25,72 50.25,77.5 45.5,77.75 49.25,81 45.25,84.75 51.25,84.75 49.75,91 54.5,86.75 57.25,91.25 57.75,85.75 64,88.75 60,82.75 64.75,83 61.25,80.25 64.75,78 60.25,76.75 61.75,71.75
N$73
  Top 1.3: U$50.P$2 73.5,71.5 arc90 U$49.P$3
  Top 2.184: U$49.P$1 U$49.P$3
N$74
  Top 1.3: U$49.P$4 arc90 76.5,71.5 U$50.P$1
  Top 2.184: U$49.P$2 U$49.P$4
N$75
  pour Bottom: 77.25,74.5 75.5,69 73.25,75 69.25,72 70.25,77.5 65.5,77.75 69.25,81 65.25,84.75 71.25,84.75 69.75,91 74.5,86.75 77.25,91.25 77.75,85.75 84,88.75 80,82.75 84.75,83 81.25,80.25 84.75,78 80.25,76.75 81.75,71.75
N$76
  Top 1.3: U$52.P$2 93.5,71.5 arc90 U$51.P$3
  Top 2.184: U$51.P$1 U$51.P$3
N$77
  Top 1.3: U$51.P$4 arc90 96.5,71.5 U$52.P$1
  Top 2.184: U$51.P$2 U$51.P$4
N$78
  pour Bottom: 97.25,74.5 95.5,69 93.25,75 89.25,72 90.25,77.5 85.5,77.75 89.25,81 85.25,84.75 91.25,84.75 89.75,91 94.5,86.75 97.25,91.25 97.75,85.75 104,88.75 100,82.75 104.75,83 101.25,80.25 104.75,78 100.25,76.75 101.75,71.75
N$79
  Top 1.3: U$54.P$2 113.5,71.5 arc90 U$53.P$3
  Top 2.184: U$53.P$1 U$53.P$3
N$80
  Top 1.3: U$53.P$4 arc90 116.5,71.5 U$54.P$1
  Top 2.184: U$53.P$2 U$53.P$4
N$81
  pour Bottom: 117.25,74.5 115.5,69 113.25,75 109.25,72 110.25,77.5 105.5,77.75 109.25,81 105.25,84.75 111.25,84.75 109.75,91 114.5,86.75 117.25,91.25 117.75,85.75 124,88.75 120,82.75 124.75,83 121.25,80.25 124.75,78 120.25,76.75 121.75,71.75
N$82
  Top 1.3: U$56.P$2 133.5,71.5 arc90 U$55.P$3
  Top 2.184: U$55.P$1 U$55.P$3
N$83
  Top 1.3: U$55.P$4 arc90 136.5,71.5 U$56.P$1
  Top 2.184: U$55.P$2 U$55.P$4
N$84
  pour Bottom: 137.25,74.5 135.5,69 133.25,75 129.25,72 130.25,77.5 125.5,77.75 129.25,81 125.25,84.75 131.25,84.75 129.75,91 134.5,86.75 137.25,91.25 137.75,85.75 144,88.75 140,82.75 144.75,83 141.25,80.25 144.75,78 140.25,76.75 141.75,71.75
N$85
  Top 1.3: U$58.P$2 153.5,71.5 arc90 U$57.P$3
  Top 2.184: U$57.P$1 U$57.P$3
N$86
  Top 1.3: U$57.P$4 arc90 156.5,71.5 U$58.P$1
  Top 2.184: U$57.P$2 U$57.P$4
N$87
  pour Bottom: 157.25,74.5 155.5,69 153.25,75 149.25,72 150.25,77.5 145.5,77.75 149.25,81 145.25,84.75 151.25,84.75 149.75,91 154.5,86.75 157.25,91.25 157.75,85.75 164,88.75 160,82.75 164.75,83 161.25,80.25 164.75,78 160.25,76.75 161.75,71.75
N$88
  Top 1.3: U$60.P$2 173.5,71.5 arc90 U$59.P$3
  Top 2.184: U$59.P$1 U$59.P$3
N$89
  Top 1.3: U$59.P$4 arc90 176.5,71.5 U$60.P$1
  Top 2.184: U$59.P$2 U$59.P$4
N$90
  pour Bottom: 177.25,74.5 175.5,69 173.25,75 169.25,72 170.25,77.5 165.5,77.75 169.25,81 165.25,84.75 171.25,84.75 169.75,91 174.5,86.75 177.25,91.25 177.75,85.75 184,88.75 180,82.75 184.75,83 181.25,80.25 184.75,78 180.25,76.75 181.75,71.75
N$91
  Top 1.3: U$62.P$2 13.5,42.5 arc90 U$61.P$3
  Top 2.184: U$61.P$1 U$61.P$3
N$92
  Top 1.3: U$61.P$4 arc90 16.5,42.5 U$62.P$1
  Top 2.184: U$61.P$2 U$61.P$4
N$93
  pour Bottom: 17.25,45.5 15.5,40 13.25,46 9.25,43 10.25,48.5 5.5,48.75 9.25,52 5.25,55.75 11.25,55.75 9.75,62 14.5,57.75 17.25,62.25 17.75,56.75 24,59.75 20,53.75 24.75,54 21.25,51.25 24.75,49 20.25,47.75 21.75,42.75
N$94
  Top 1.3: U$64.P$2 33.5,42.5 arc90 U$63.P$3
  Top 2.184: U$63.P$1 U$63.P$3
N$95
  Top 1.3: U$63.P$4 arc90 36.5,42.5 U$64.P$1
  Top 2.184: U$63.P$2 U$63.P$4
N$96
  pour Bottom: 37.25,45.5 35.5,40 33.25,46 29.25,43 30.25,48.5 25.5,48.75 29.25,52 25.25,55.75 31.25,55.75 29.75,62 34.5,57.75 37.25,62.25 37.75,56.75 44,59.75 40,53.75 44.75,54 41.25,51.25 44.75,49 40.25,47.75 41.75,42.75
N$97
  Top 1.3: U$66.P$2 53.5,42.5 arc90 U$65.P$3
  Top 2.184: U$65.P$1 U$65.P$3
N$98
  Top 1.3: U$65.P$4 arc90 56.5,42.5 U$66.P$1
  Top 2.184: U$65.P$2 U$65.P$4
N$99
  pour Bottom: 57.25,45.5 55.5,40 53.25,46 49.25,43 50.25,48.5 45.5,48.75 49.25,52 45.25,55.75 51.25,55.75 49.75,62 54.5,57.75 57.25,62.25 57.75,56.75 64,59.75 60,53.75 64.75,54 61.25,51.25 64.75,49 60.25,47.75 61.75,42.75
N$100
  Top 1.3: U$68.P$2 73.5,42.5 arc90 U$67.P$3
  Top 2.184: U$67.P$1 U$67.P$3
N$101
  Top 1.3: U$67.P$4 arc90 76.5,42.5 U$68.P$1
  Top 2.184: U$67.P$2 U$67.P$4
N$102
  pour Bottom: 77.25,45.5 75.5,40 73.25,46 69.25,43 70.25,48.5 65.5,48.75 69.25,52 65.25,55.75 71.25,55.75 69.75,62 74.5,57.75 77.25,62.25 77.75,56.75 84,59.75 80,53.75 84.75,54 81.25,51.25 84.75,49 80.25,47.75 81.75,42.75
N$103
  Top 1.3: U$70.P$2 93.5,42.5 arc90 U$69.P$3
  Top 2.184: U$69.P$1 U$69.P$3
N$104
  Top 1.3: U$69.P$4 arc90 96.5,42.5 U$70.P$1
  Top 2.184: U$69.P$2 U$69.P$4
N$105
  pour Bottom: 97.25,45.5 95.5,40 93.25,46 89.25,43 90.25,48.5 85.5,48.75 89.25,52 85.25,55.75 91.25,55.75 89.75,62 94.5,57.75 97.25,62.25 97.75,56.75 104,59.75 100,53.75 104.75,54 101.25,51.25 104.75,49 100.25,47.75 101.75,42.75
N$106
  Top 1.3: U$72.P$2 113.5,42.5 arc90 U$71.P$3
  Top 2.184: U$71.P$1 U$71.P$3
N$107
  Top 1.3: U$71.P$4 arc90 116.5,42.5 U$72.P$1
  Top 2.184: U$71.P$2 U$71.P$4
N$108
  pour Bottom: 117.25,45.5 115.5,40 113.25,46 109.25,43 110.25,48.5 105.5,48.75 109.25,52 105.25,55.75 111.25,55.75 109.75,62 114.5,57.75 117.25,62.25 117.75,56.75 124,59.75 120,53.75 124.75,54 121.25,51.25 124.75,49 120.25,47.75 121.75,42.75
N$109
  Top 1.3: U$74.P$2 133.5,42.5 arc90 U$73.P$3
  Top 2.184: U$73.P$1 U$73.P$3
N$110
  Top 1.3: U$73.P$4 arc90 136.5,42.5 U$74.P$1
  Top 2.184: U$73.P$2 U$73.P$4
N$111
  pour Bottom: 137.25,45.5 135.5,40 133.25,46 129.25,43 130.25,48.5 125.5,48.75 129.25,52 125.25,55.75 131.25,55.75 129.75,62 134.5,57.75 137.25,62.25 137.75,56.75 144,59.75 140,53.75 144.75,54 141.25,51.25 144.75,49 140.25,47.75 141.75,42.75
N$112
  Top 1.3: U$76.P$2 153.5,42.5 arc90 U$75.P$3
  Top 2.184: U$75.P$1 U$75.P$3
N$113
  Top 1.3: U$75.P$4 arc90 156.5,42.5 U$76.P$1
  Top 2.184: U$75.P$2 U$75.P$4
N$114
  pour Bottom: 157.25,45.5 155.5,40 153.25,46 149.25,43 150.25,48.5 145.5,48.75 149.25,52 145.25,55.75 151.25,55.75 149.75,62 154.5,57.75 157.25,62.25 157.75,56.75 164,59.75 160,53.75 164.75,54 161.25,51.25 164.75,49 160.25,47.75 161.75,42.75
N$115
  Top 1.3: U$78.P$2 173.5,42.5 arc90 U$77.P$3
  Top 2.184: U$77.P$1 U$77.P$3
N$116
  Top 1.3: U$77.P$4 arc90 176.5,42.5 U$78.P$1
  Top 2.184: U$77.P$2 U$77.P$4
N$117
  pour Bottom: 177.25,45.5 175.5,40 173.25,46 169.25,43 170.25,48.5 165.5,48.75 169.25,52 165.25,55.75 171.25,55.75 169.75,62 174.5,57.75 177.25,62.25 177.75,56.75 184,59.75 180,53.75 184.75,54 181.25,51.25 184.75,49 180.25,47.75 181.75,42.75
N$118
  Top 1.3: U$80.P$2 53.5,13.5 arc90 U$79.P$3
  Top 2.184: U$79.P$1 U$79.P$3
N$119
  Top 1.3: U$79.P$4 arc90 56.5,13.5 U$80.P$1
  Top 2.184: U$79.P$2 U$79.P$4
N$120
  pour Bottom: 57.25,16.5 55.5,11 53.25,17 49.25,14 50.25,19.5 45.5,19.75 49.25,23 45.25,26.75 51.25,26.75 49.75,33 54.5,28.75 57.25,33.25 57.75,27.75 64,30.75 60,24.75 64.75,25 61.25,22.25 64.75,20 60.25,18.75 61.75,13.75
N$121
  Top 1.3: U$82.P$2 73.5,13.5 arc90 U$81.P$3
  Top 2.184: U$81.P$1 U$81.P$3
N$122
  Top 1.3: U$81.P$4 arc90 76.5,13.5 U$82.P$1
  Top 2.184: U$81.P$2 U$81.P$4
N$123
  pour Bottom: 77.25,16.5 75.5,11 73.25,17 69.25,14 70.25,19.5 65.5,19.75 69.25,23 65.25,26.75 71.25,26.75 69.75,33 74.5,28.75 77.25,33.25 77.75,27.75 84,30.75 80,24.75 84.75,25 81.25,22.25 84.75,20 80.25,18.75 81.75,13.75
N$124
  Top 1.3: U$84.P$2 93.5,13.5 arc90 U$83.P$3
  Top 2.184: U$83.P$1 U$83.P$3
N$125
  Top 1.3: U$83.P$4 arc90 96.5,13.5 U$84.P$1
  Top 2.184: U$83.P$2 U$83.P$4
N$126
  pour Bottom: 97.25,16.5 95.5,11 93.25,17 89.25,14 90.25,19.5 85.5,19.75 89.25,23 85.25,26.75 91.25,26.75 89.75,33 94.5,28.75 97.25,33.25 97.75,27.75 104,30.75 100,24.75 104.75,25 101.25,22.25 104.75,20 100.25,18.75 101.75,13.75
N$127
  Top 1.3: U$86.P$2 113.5,13.5 arc90 U$85.P$3
  Top 2.184: U$85.P$1 U$85.P$3
N$128
  Top 1.3: U$85.P$4 arc90 116.5,13.5 U$86.P$1
  Top 2.184: U$85.P$2 U$85.P$4
N$129
  pour Bottom: 117.25,16.5 115.5,11 113.25,17 109.25,14 110.25,19.5 105.5,19.75 109.25,23 105.25,26.75 111.25,26.75 109.75,33 114.5,28.75 117.25,33.25 117.75,27.75 124,30.75 120,24.75 124.75,25 121.25,22.25 124.75,20 120.25,18.75 121.75,13.75
N$130
  Top 1.3: U$88.P$2 133.5,13.5 arc90 U$87.P$3
  Top 2.184: U$87.P$1 U$87.P$3
N$131
  Top 1.3: U$87.P$4 arc90 136.5,13.5 U$88.P$1
  Top 2.184: U$87.P$2 U$87.P$4
N$132
  pour Bottom: 137.25,16.5 135.5,11 133.25,17 129.25,14 130.25,19.5 125.5,19.75 129.25,23 125.25,26.75 131.25,26.75 129.75,33 134.5,28.75 137.25,33.25 137.75,27.75 144,30.75 140,24.75 144.75,25 141.25,22.25 144.75,20 140.25,18.75 141.75,13.75
N$133
  Top 1.3: U$90.P$2 153.5,13.5 arc90 U$89.P$3
  Top 2.184: U$89.P$1 U$89.P$3
N$134
  Top 1.3: U$89.P$4 arc90 156.5,13.5 U$90.P$1
  Top 2.184: U$89.P$2 U$89.P$4
N$135
  pour Bottom: 157.25,16.5 155.5,11 153.25,17 149.25,14 150.25,19.5 145.5,19.75 149.25,23 145.25,26.75 151.25,26.75 149.75,33 154.5,28.75 157.25,33.25 157.75,27.75 164,30.75 160,24.75 164.75,25 161.25,22.25 164.75,20 160.25,18.75 161.75,13.75
N$136
  Top 1.3: U$92.P$2 173.5,13.5 arc90 U$91.P$3
  Top 2.184: U$91.P$1 U$91.P$3
N$137
  Top 1.3: U$91.P$4 arc90 176.5,13.5 U$92.P$1
  Top 2.184: U$91.P$2 U$91.P$4
N$138
  pour Bottom: 177.25,16.5 175.5,11 173.25,17 169.25,14 170.25,19.5 165.5,19.75 169.25,23 165.25,26.75 171.25,26.75 169.75,33 174.5,28.75 177.25,33.25 177.75,27.75 184,30.75 180,24.75 184.75,25 181.25,22.25 184.75,20 180.25,18.75 181.75,13.75

## Text on the board
tNames: Popping Element Rev B | Blinkinlabs, LLC
Vscore: Vscore